# Altium PCB S3E_A25P01-01A.PcbDoc
Units mm, origin at the board's own origin, x right, y up, seen from the top; angles counter-clockwise.
Board outline 95 x 85 mm, 2 copper layers (Top Layer, Bottom Layer); 39 components, 33 nets, 139 pads, 34 vias.
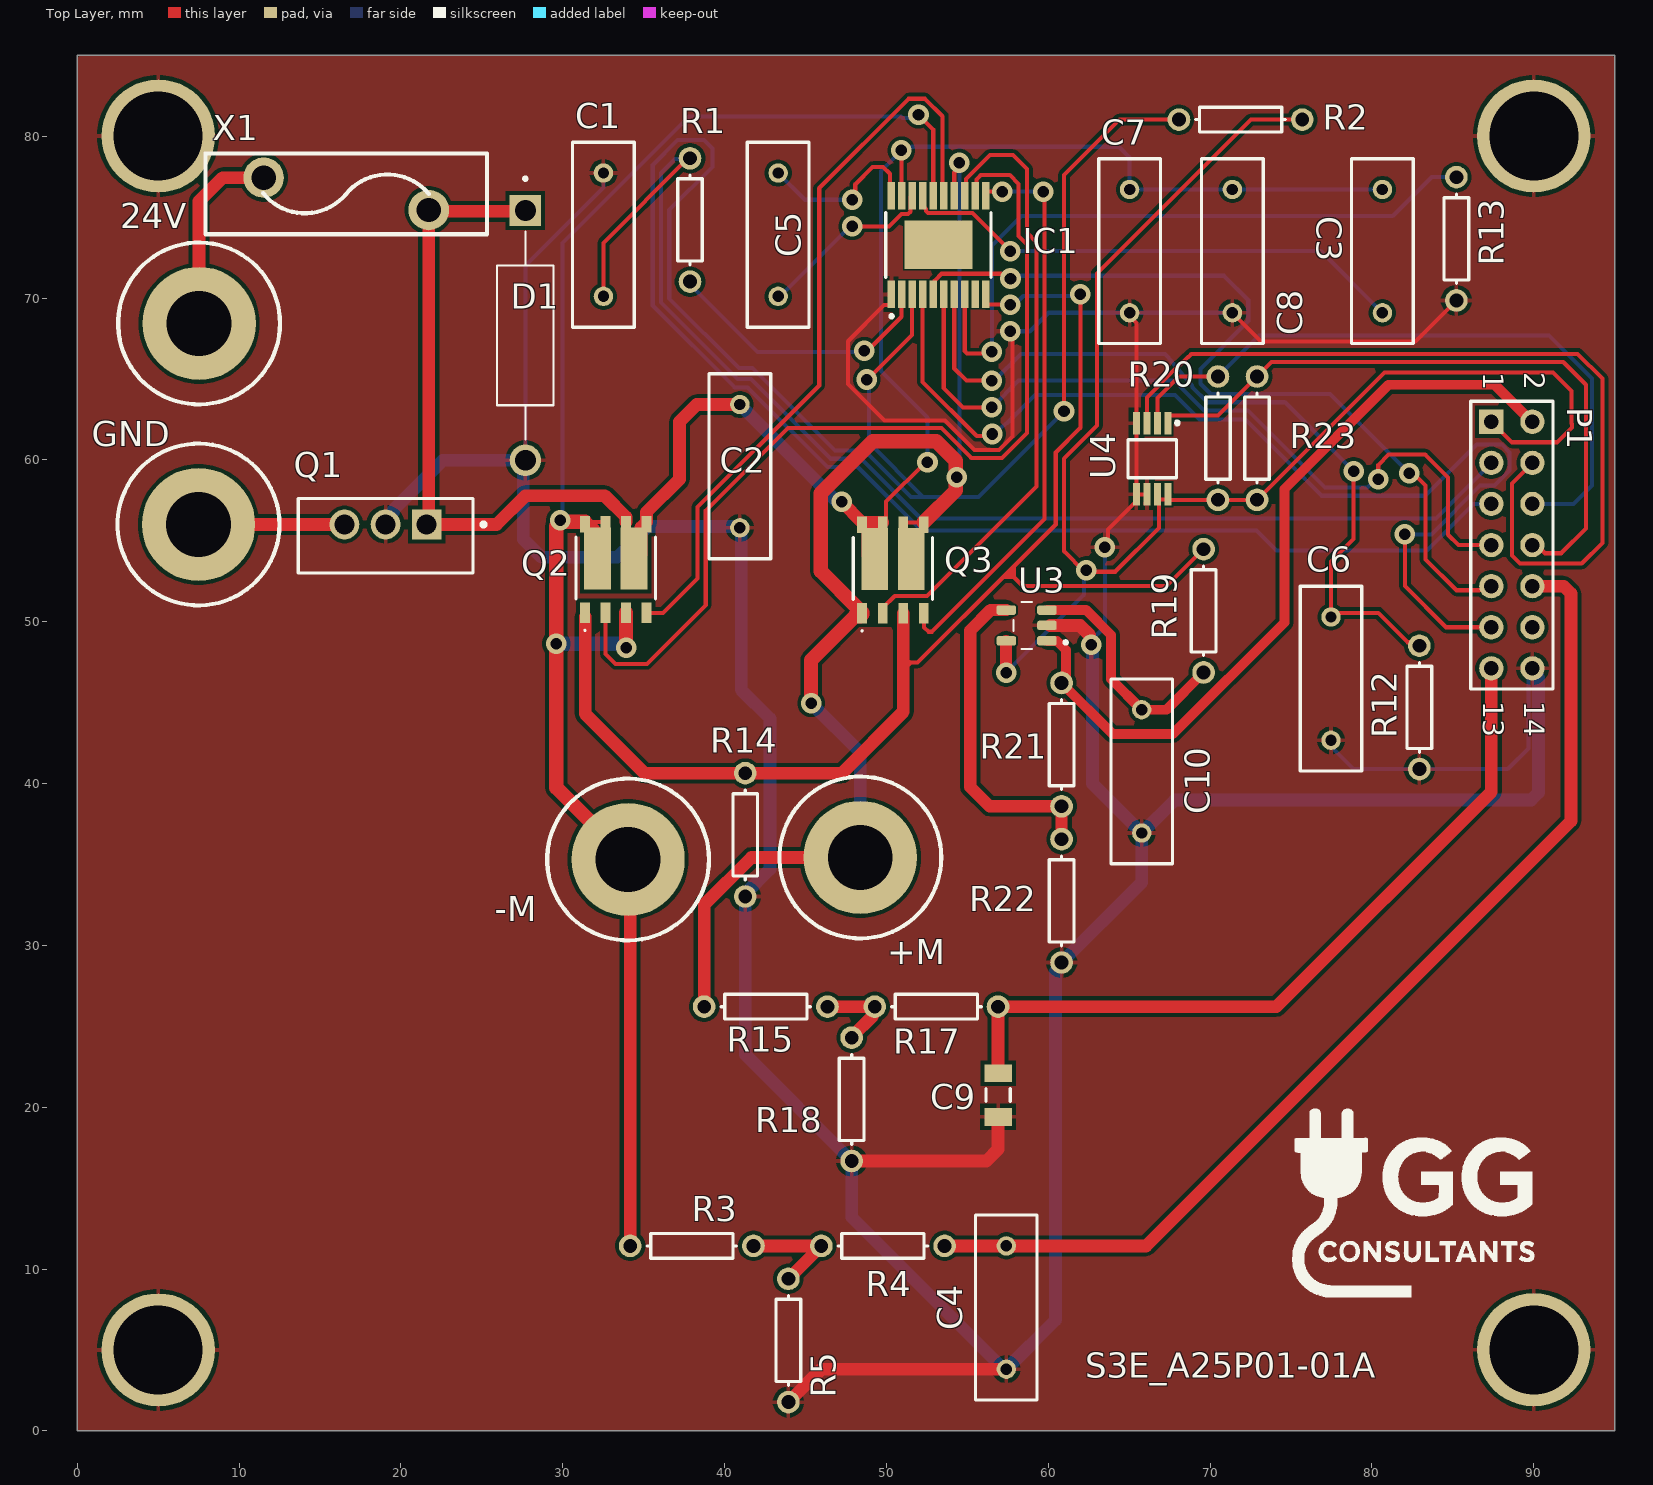
[diagram p0: Top Layer view]
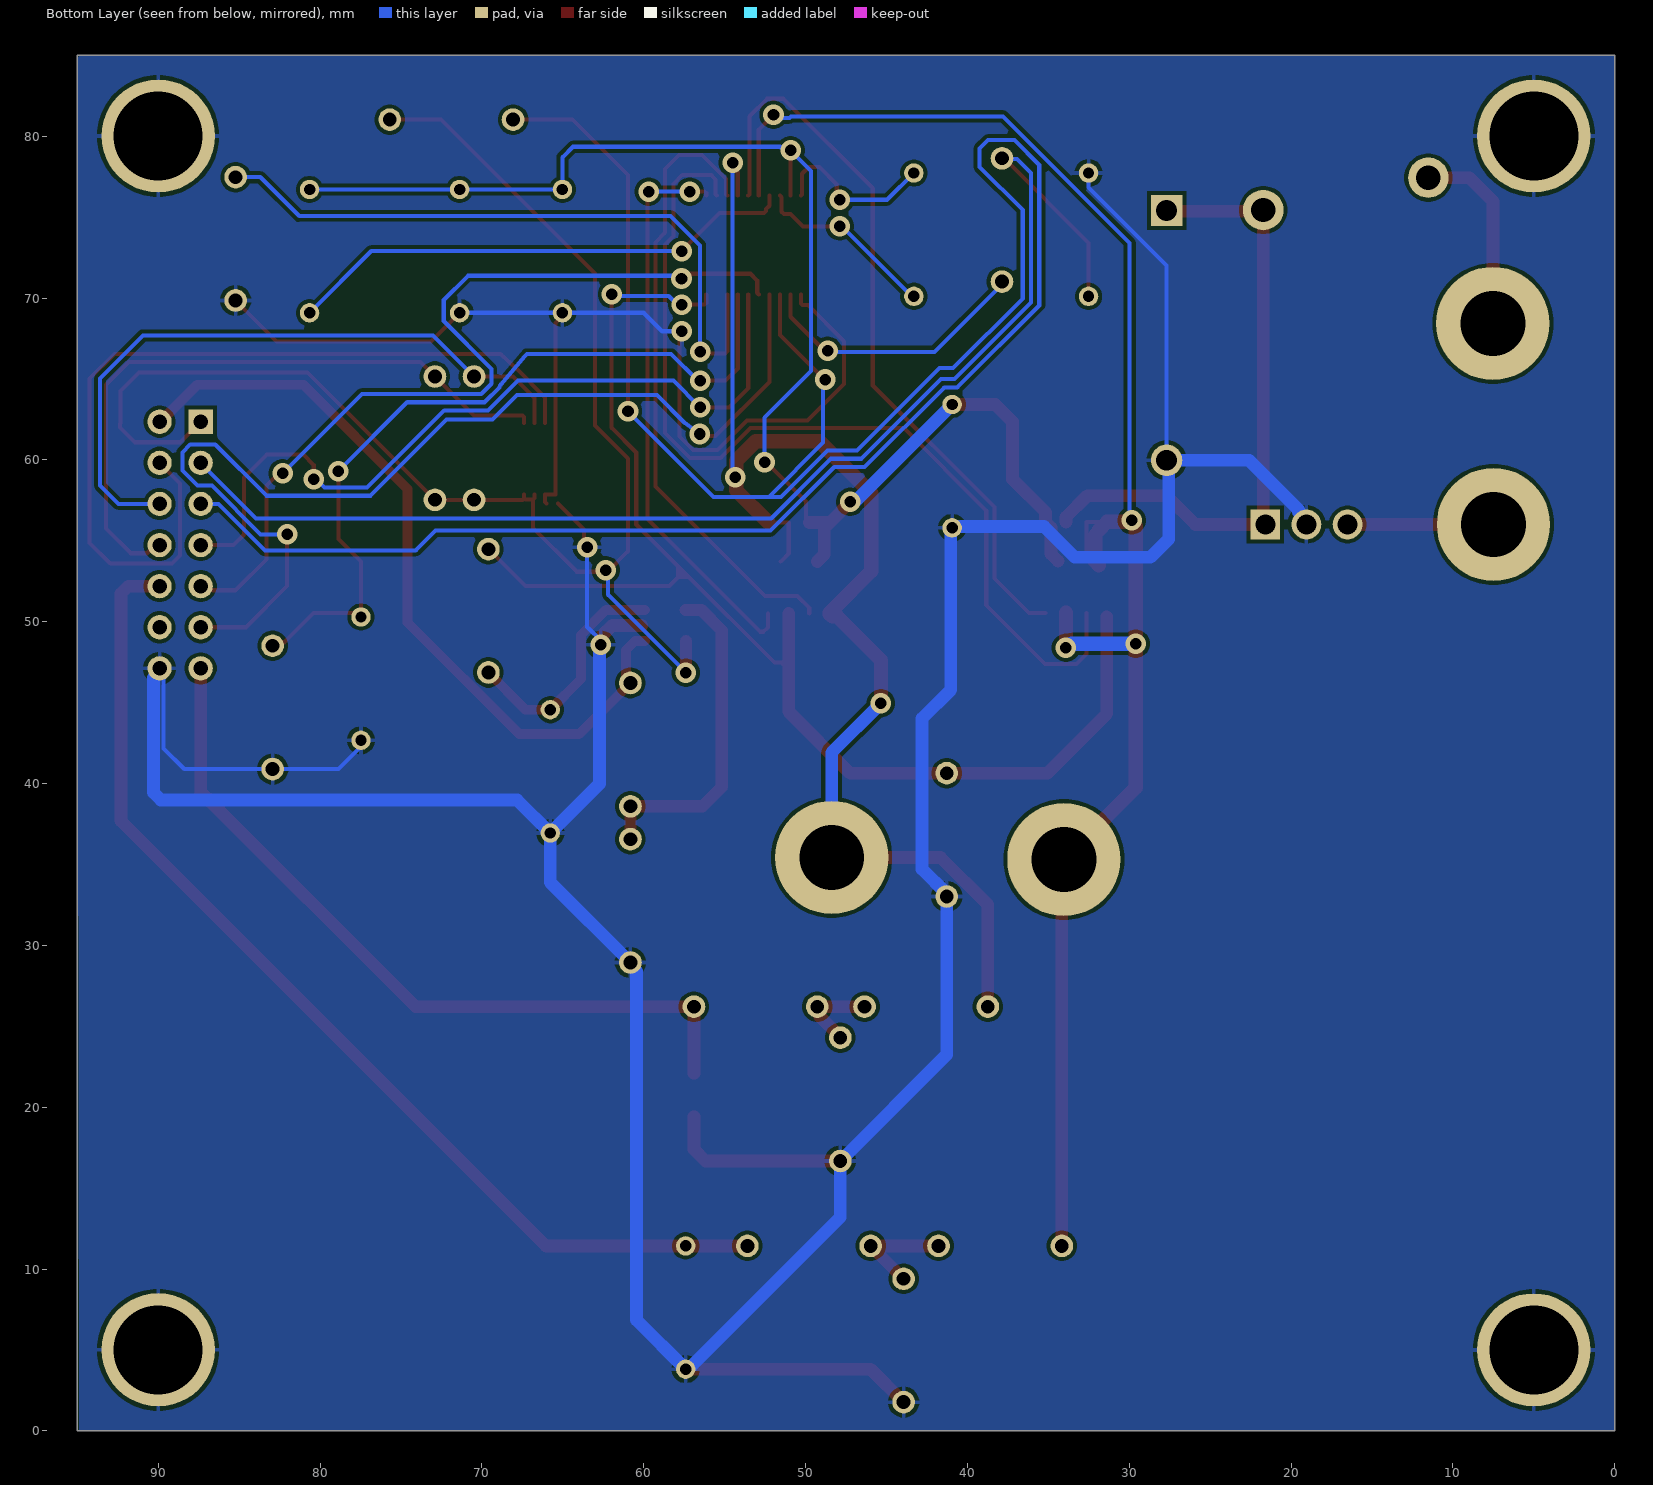
[diagram p1: Bottom Layer view, seen from below]

## Layer stack, top to bottom
Top Solder: solder mask 0.0102, Solder Resist, Dk 3.5
Top Layer: signal copper 0.0356
Dielectric 1: dielectric 0.32, FR-4, Dk 4.8
Bottom Layer: signal copper 0.0356
Bottom Solder: solder mask 0.0102, Solder Resist, Dk 3.5

## Board outline
0,0 0,85 95,85 95,0

## Design rules (kind name [scope] priority, off if disabled: settings)
Clearance [InComponentClass('U_class')] p1: gap=0.102 ignorepadtopadclearanceinfootprint=TRUE
Clearance Clearance_1 [All] p2: gap=0.229 ignorepadtopadclearanceinfootprint=TRUE
Height height [All] p1: minheight=0 maxheight=30.48 prefheight=12.7
Height Height3 [InComponent('No Component')] p2: minheight=0 maxheight=30.48 prefheight=12.7
HoleSize [All] p1: absolutevalues=TRUE maxlimit=76.2 minlimit=0.025 maxpercent=80.000 minpercent=20.000
MinimumSolderMaskSliver [All] p1: minsoldermaskwidth=0.102
PolygonConnect [All] p1: connectstyle=Relief reliefconductorwidth=0.254 reliefentries=4 polygonreliefangle="90 Angle" airgapwidth=0.254
RoutingVias [All] p1: holewidth=0.711 width=1.27 viastyle="Through Hole" minholewidth=0.711 minwidth=1.27 maxholewidth=0.711 maxwidth=1.27
ShortCircuit "ShortCircuit Q2 & Q3" [InComponentClass('ShortCircuitAllowed')] p1: allowed=TRUE
ShortCircuit [All] p2: allowed=FALSE
ShortCircuit ShortCircuit_1 [All] p3: allowed=FALSE
SilkToSolderMaskClearance [All] p1: minsilkscreentomaskgap=0 clearancetoexposedcopper=TRUE
SolderMaskExpansion [All] p1: expansion=0.102 istentingtop=FALSE
SupplyNets "Schematic Supply Nets" [InNet('GND')] p1: voltage=0.000
Width [All] p1: maxlimit=1.27 minlimit=0.254 preferedwidth=0.254
25 further rules are at their usual default settings.

## Components (designator, comment, footprint, x,y, rotation, side; value= is the part's Value field where it differs from the comment)
24V "VCC_pin" banana_connector 7.528,68.43 r0 top
+M "VCC_pin" banana_connector 48.387,35.433 r90 top
-M "VCC_pin" banana_connector 34.036,35.306 r90 top
C1 "Cap" RAD-0.3 32.512,73.914 r270 top value=100pF
C2 "Cap" RAD-0.3 40.942,59.611 r90 top value=100pF
C3 "Cap" RAD-0.3 80.645,72.898 r270 top value=100pF
C4 "Cap" RAD-0.3 57.404,7.62 r90 top value=6n
C5 "Cap" RAD-0.3 43.307,73.914 r270 top value=100pF
C6 "Cap" RAD-0.3 77.47,46.482 r90 top value=1n
C7 "Cap" RAD-0.3 65.024,72.898 r90 top value=100pF
C8 "Cap" RAD-0.3 71.374,72.898 r90 top value=100pF
C9 "Cap" C1206 56.896,20.753 r90 top value=6n
C10 "Cap" RAD-0.3 65.773,40.753 r90 top value=6n
D1 "1N5360BG" DIOAD1543W101L863D368 27.686,67.691 r270 top
GND "VCC_pin" banana_connector 7.493,56.007 r0 top
IC1 "A4955GLPTR-T" A4405KLPTRT 53.213,73.279 r90 top
P1 "Header 7X2" HDR2X7 87.376,62.357 r270 top
Q1 "IRFB7545" IFX-PG-TO220-3-904 19.05,56.007 r270 top
Q2 "HP8KF7HTB1" HP8KC6TB1 33.274,56.521 r0 top
Q3 "HP8KF7HTB1" HP8KC6TB1 50.403,56.491 r0 top
R1 "Res1" AXIAL-0.3 37.861,74.824 r90 top value=1K
R2 "Res1" AXIAL-0.3 71.882,81.026 r0 top value=1K
R3 "Res1" AXIAL-0.3 37.973,11.43 r0 top value=240k
R4 "Res1" AXIAL-0.3 49.784,11.43 r0 top value=10K
R5 "Res1" AXIAL-0.3 43.942,5.588 r90 top value=60K
R12 "30k" AXIAL-0.3 82.931,44.704 r90 top
R13 "Res1" AXIAL-0.3 85.217,73.66 r90 top value=150k
R14 "Res1" AXIAL-0.3 41.275,36.83 r90 top value=0.25
R15 "Res1" AXIAL-0.3 42.545,26.214 r0 top value=240k
R17 "Res1" AXIAL-0.3 53.086,26.214 r0 top value=10K
R18 "Res1" AXIAL-0.3 47.849,20.487 r90 top value=60K
R19 "Res1" AXIAL-0.3 69.596,50.673 r270 top value=10K
R20 "Res1" AXIAL-0.3 70.485,61.341 r90 top value=10K
R21 "Res1" AXIAL-0.3 60.82,42.404 r90 top value=1.25M
R22 "Res1" AXIAL-0.3 60.82,32.752 r90 top value=1K
R23 "Res1" AXIAL-0.3 72.898,61.341 r90 top value=10K
U3 "LMV321AIDBVRG4" SOT95P280X145-5N 58.661,49.77 r180 top
U4 "MCP9808-E/MS" SOP65P490X110-8N 66.421,60.071 r270 top
X1 "MF-R500-2" MF-R500-2 16.617,76.438 r0 top

## Footprints (in the part's own frame and the unit in brackets; to place one, negate y for a bottom-side part, rotate by r counter-clockwise, add the part's x,y. Pads: shape width x height; smd on the part's side, far side on the other; paste and mask are expansions set on the pad)
A4405KLPTRT [mm]
  rect 1.7x0.45 smd: 1(-3.05,2.925) 2(-3.05,2.275) 3(-3.05,1.625) 4(-3.05,0.975) 5(-3.05,0.325) 6(-3.05,-0.325) 7(-3.05,-0.975) 8(-3.05,-1.625) 9(-3.05,-2.275) 10(-3.05,-2.925) 11(3.05,-2.925) 12(3.05,-2.275) 13(3.05,-1.625) 14(3.05,-0.975) 15(3.05,-0.325) 16(3.05,0.325) 17(3.05,0.975) 18(3.05,1.625) 19(3.05,2.275) 20(3.05,2.925)
  rect 3x4.2 smd: 21(0,0)
  silkscreen extent -4.5,-3.25 2,3.25, body extent -3.19,-3.31 3.21,3.29, height 1.04
AXIAL-0.3 [mm] "Axial Device, Thru-Hole; 2 Leads; 0.3 in Pin Spacing"
  round 1.4 hole 0.85: 1(-3.81,0) 2(3.81,0)
  silkscreen extent -2.77,-0.76 2.77,0.76
banana_connector [mm]
  round 7 hole 4: 1(0,0)
  silkscreen extent -5,-5 5,5
C1206 [mm] "Chip Capacitor, Body 3.2x1.6mm, IPC High Density"
  rect 1.1x1.7 smd: 1(-1.35,0) 2(1.35,0)
  silkscreen extent -0.4,-0.75 0.4,0.75, body extent -1.7,-0.9 1.7,0.9, height 1.3
DIOAD1543W101L863D368 [mm]
  rect 1.94x1.94 / inner round 1.94 / far side rect 1.94x1.94 hole 1.29: 1(-7.715,0)
  round 1.94 hole 1.29: 2(7.715,0)
  silkscreen extent -9.78,-1.74 6.42,1.74
HDR2X7 [mm] "Connector; Header; 7x2 Position"
  rect 1.5x1.5 hole 0.9: 1(0,0)
  round 1.5 hole 0.9: 2(0,2.54) 3(2.54,0) 4(2.54,2.54) 5(5.08,0) 6(5.08,2.54) 7(7.62,0) 8(7.62,2.54) 9(10.16,0) 10(10.16,2.54) 11(12.7,0) 12(12.7,2.54) 13(15.24,0) 14(15.24,2.54)
  silkscreen extent -1.27,-1.27 16.51,3.81
HP8KC6TB1 [mm]
  rect 0.61x1.27 smd: 1(-1.905,-5.975) 2(-0.635,-5.975) 3(0.635,-5.975) 4(1.905,-5.975)
  rect 1.655x3.5 smd: 5(1.127,-2.77) 8(-1.127,-2.77)
  rect 1.91x0.31 smd: 5(1.255,-0.864) 8(-1.255,-0.864)
  rect 0.61x0.71 smd: 5(1.905,-0.355) 6(0.635,-0.355) 7(-0.635,-0.355) 8(-1.905,-0.355)
  silkscreen extent -2.45,-7.1 2.45,-1.3, body extent -2.51,-6.31 2.51,-0.31, height 1
IFX-PG-TO220-3-904 [mm] "TO,flange mount,2.54mm pitch;3 pin,4.45mm L X 10.66mm W X 19.15mm H body"
  rect 1.84x1.84 hole 1.24 paste-2539.97 mask+0: 1(0,2.54)
  round 1.84 hole 1.24 paste-2539.97 mask+0: 2(0,0) 3(0,-2.54)
  silkscreen extent -1.6,-5.4 3,6.18, body extent -1.53,-5.33 2.93,5.33, height 19.1
MF-R500-2 [mm]
  round 2.5 hole 1.5: 1(-5.1,1) 2(5.1,-1)
  silkscreen extent -8.7,-2.5 8.7,2.5, body extent -8.7,-1.5 8.7,1.5, height 28.75
RAD-0.3 [mm] "Radial Cap, Thru-Hole; 2 Leads; 0.3 in Pin Spacing"
  round 1.2 hole 0.7: 1(-3.81,0) 2(3.81,0)
  silkscreen extent -5.71,-1.91 5.71,1.91
SOP65P490X110-8N [mm]
  rect 1.4x0.45 smd: 1(-2.2,0.975) 2(-2.2,0.325) 3(-2.2,-0.325) 4(-2.2,-0.975) 5(2.2,-0.975) 6(2.2,-0.325) 7(2.2,0.325) 8(2.2,0.975)
  silkscreen extent -2.39,-1.5 1.18,1.73, body extent -2.45,-1.5 2.45,1.5, height 1.1
SOT95P280X145-5N [mm]
  rrect50% 1.21x0.59 smd: 1(-1.255,0.95) 2(-1.255,0) 3(-1.255,-0.95) 4(1.255,-0.95) 5(1.255,0.95)
  silkscreen extent -2.51,-1.45 0.8,1.45, body extent -1.4,-1.45 1.4,1.45, height 1.45

## Part data
C1 C2 C3 C4 C5 C6 C7 C8 C9 C10: "Capacitor", LatestRevisionDate=17-Jul-2002, LatestRevisionNote="Re-released for DXP Platform.", PackageDescription="Radial Cap, Thru-Hole; 2 Leads; 0.3 in Pin Spacing", PackageReference=RAD-0.3, Published=8-Jun-2000, Publisher="Altium Limited"
D1: Package=None, Availability=Unavailable, MF="{'manufacturer': u'onsemi'}", MP=1N5360BG, Price=None
IC1: "Integrated Circuit", Manufacturer_Name="Allegro Microsystems", Mouser Part Number=250-A4955GLPTR-T, Arrow Part Number=A4955GLPTR-T, Arrow Price/Stock=null?region=nac, Datasheet Link=https://www.allegromicro.com/~/media/Files/Datasheets/A4955-Datasheet.ashx, Height=1.2mm, Manufacturer_Part_Number=A4955GLPTR-T, Mouser Price/Stock=https://www.mouser.co.uk/ProductDetail/Allegro-MicroSystems/A4955GLPTR-T?qs=pUKx8fyJudCBeWBIJtW5Eg%3D%3D
P1: "Header, 7-Pin, Dual row", LatestRevisionDate=17-Jul-2002, LatestRevisionNote="Re-released for DXP Platform.", Publisher="Altium Limited"
Q1: "Insulated-Gate Field-Effect Transistor (IGFET), N-Channel, Enhancement, Body Diode, Pin 1 Gate, 2 Drain, 3 Source, 3 Pins", Manufacturer="Infineon Technologies", Manufacturer Order Number=IRFB7545, PackageReference=PG-TO220-3-904
Q2 Q3: "MOSFET (N-Channel)", Manufacturer_Name="ROHM Semiconductor", Datasheet Link=https://fscdn.rohm.com/en/products/databook/datasheet/discrete/transistor/mosfet/hp8kf7htb1-e.pdf, Height=1.1mm, Manufacturer_Part_Number=HP8KF7HTB1
R1 R2 R3 R4 R5 R13 R14 R15 R17 R18 R19 R20 R21 R22 R23: "Resistor", LatestRevisionDate=17-Jul-2002, LatestRevisionNote="Re-released for DXP Platform.", PackageDescription="Axial Device, Thru-Hole; 2 Leads; 0.3 in Pin Spacing", PackageReference=AXIAL-0.3, Published=8-Jun-2000, Publisher="Altium Limited"
R12: library part Res1, "Resistor", LatestRevisionDate=17-Jul-2002, LatestRevisionNote="Re-released for DXP Platform.", PackageDescription="Axial Device, Thru-Hole; 2 Leads; 0.3 in Pin Spacing", PackageReference=AXIAL-0.3, Published=8-Jun-2000, Publisher="Altium Limited"
U3: "Single Low-Voltage Rail-to-Rail Output Operational Amplifier see LMV321A for upgraded version 5-SOT-23 -40 to 125", Package="SOT-23-5 Texas Instruments", Check_prices=https://www.snapeda.com/parts/LMV321IDBVRG4/Texas+Instruments/view-part/?ref=eda, MF="Texas Instruments", MP=LMV321IDBVRG4, SnapEDA_Link=https://www.snapeda.com/parts/LMV321IDBVRG4/Texas+Instruments/view-part/?ref=snap
U4: "Microchip MCP9808-E/MS Temperature Sensor 8-Pin MSOP, -40 - +125 degC", Package="MSOP-8 Microchip", Check_prices=https://www.snapeda.com/parts/MCP9808-E/MS/Microchip/view-part/?ref=eda, MF=Microchip, MP=MCP9808-E/MS, SnapEDA_Link=https://www.snapeda.com/parts/MCP9808-E/MS/Microchip/view-part/?ref=snap

## Free pads (board coordinates)
  round 7 hole 5.5: 7(5,5) 7(5,80.011) 7(90,5.011) 7(90,80.011)

## Via types
v1: diameter 1.27, hole 0.711, Top Layer to Bottom Layer, 34 vias

## Nets (pads, with @x,y where several pads share a name; then routed paths per layer and width w, separated by ;. In a path a pad name is that pad's centre, name@x,y a point inside that pad or via, vN(x,y) a via of type N, cw(c..) or ccw(c..) an arc to the next point about the centre after c; other vN are vias at no path point)
+5V: P1.1 R2.2 R20.1 R23.1 U3.5 U4.7 U4.8 | length 92.4
  Top Layer w0.254: U3.5@57.391,48.805 U3.5 ; v1@62.357,53.086 64.135,53.086 66.844,55.795 U4.7@66.844,57.549 ; v1(62.357,53.188) 62.243,53.073 60.96,54.356 60.96,60.071 63.002,62.113 63.002,71.511 72.517,81.026 R2.2 ; U4.7 66.746,57.647 U4.7@66.844,57.549 ; U4.8@67.396,57.629 67.494,57.531 R20.1 R23.1 80.772,65.405 91.186,65.405 92.329,64.262 92.329,62.23 92.351,62.208 92.351,61.998 91.44,61.087 88.646,61.087 P1.1 ; U4.8 67.396,57.647 67.298,57.549 U4.7@66.844,57.549
  Top Layer w0.762: v1(57.391,46.849) U3.5@57.391,48.805
  Bottom Layer w0.254: v1(57.391,46.849) 62.211,51.669 62.211,53.042 v1(62.357,53.188)
AIOUT: C1.2 P1.3 R1.2 | length 79.1
  Top Layer w0.254: C1.2 32.512,73.406 R1.2@37.719,78.613
  Bottom Layer w0.254: R1.2 37.731,78.676 37.64,78.585 36.929,78.585 36.068,77.724 36.068,69.723 40.802,64.989 41.638,64.989 46.556,60.071 48.436,60.071 48.51,59.997 52.119,56.388 83.947,56.388 P1.3
GHA: IC1.15 Q2.4 | length 46.5
  Top Layer w0.254: Q2.4 36.195,50.546 38.329,52.68 38.329,57.081 45.847,64.599 45.847,76.786 51.373,82.312 52.39,82.312 53.469,81.234 53.469,76.398 IC1.15
GHB: IC1.13 Q3.2 | length 38.6
  Top Layer w0.254: Q3.2 49.768,50.846 50.512,51.59 52.515,51.59 59.277,58.352 59.277,73.434 58.674,74.037 58.674,77.978 57.81,78.842 56.39,78.842 54.907,77.359 54.907,76.398 IC1.13
GLA: IC1.12 Q2.2 | length 59.3
  Top Layer w0.254: Q2.2 32.639,48.006 33.249,47.396 35.199,47.396 38.837,51.034 38.837,56.871 43.925,61.959 53.409,61.959 55.242,60.125 57.144,60.125 58.681,61.662 58.681,73.312 58.166,73.827 58.166,77.053 57.622,77.597 55.828,77.597 55.557,77.326 55.557,76.398 IC1.12
GLB: IC1.11 Q3.4 | length 35.3
  Top Layer w0.254: Q3.4 52.325,50.499 52.325,49.649 52.593,49.381 52.803,49.381 59.76,56.338 59.76,76.511 v1(59.69,76.581) ; IC1.11 56.138,76.483 56.236,76.581 v1(57.15,76.581)
  Bottom Layer w0.254: v1(57.15,76.581) v1(59.69,76.581)
GND: C1.1 C2.1 C4.1 C6.1 C7.1 C8.1 C9.1 C10.1 D1.2 IC1.1 P1.14 pad.7 Q1.2 R5.1 R12.1 R13.1 R14.1 R18.1 R22.1 U3.2 U4.4 U4.5 U4.6 | length 318.6
  Top Layer w0.254: IC1.1 50.288,69.656 50.19,69.558 49.853,69.558 47.625,67.33 47.625,64.687 49.87,62.441 53.609,62.441 55.442,60.608 56.944,60.608 57.785,61.449 57.785,67.818 v1(57.658,67.945) ; v1(63.5,54.61) 63.694,54.804 63.694,55.693 U4.5@65.299,57.298 ; C7.1 65.024,68.888 65.446,68.466 U4.5 U4.6 66.096,57.396 U4.6@65.998,57.298 ; C8.1 73.152,67.31 82.677,67.31 R13.1
  Top Layer w0.787: Q1.2 Q1.2@19.177,55.88 ; R5.1 45.974,3.81 C4.1 ; R18.1 56.174,16.677 56.896,17.399 C9.1 ; U3.2@60.128,49.77 61.948,49.77 62.558,49.16 62.558,48.657 v1(62.65,48.564)
  Bottom Layer w0.254: D1.2 27.686,72.001 32.512,76.827 C1.1 ; v1(57.658,67.945) 58.855,67.945 59.998,69.088 C7.1 C8.1 ; v1(62.65,48.564) 62.65,48.827 63.426,49.602 63.5,49.676 v1(63.5,54.61) ; C6.1 77.651,42.491 77.651,42.11 78.867,40.894 R12.1 88.392,40.894 89.662,42.164 89.662,46.345 89.678,46.361 89.678,46.879 P1.14
  Bottom Layer w0.787: Q1.2 19.05,56.292 19.534,56.776 19.534,56.919 22.591,59.976 D1.2 ; D1.2@27.559,59.849 27.559,55.118 28.702,53.975 33.359,53.975 35.264,55.88 41.021,55.88 41.021,45.799 42.799,44.021 42.799,34.71 41.275,33.186 R14.1 41.275,23.251 R18.1 47.849,13.212 57.045,4.016 57.086,4.016 57.292,3.81 C4.1 60.452,6.858 60.452,28.408 60.82,28.776 R22.1 65.773,33.895 C10.1 ; v1(62.65,48.564) 62.725,48.489 62.725,39.991 C10.1 ; P1.14 89.916,46.924 90.297,46.543 90.297,39.45 89.836,38.989 67.82,38.989 C10.1
IN1: IC1.6 P1.7 | length 49.3
  Top Layer w0.254: IC1.6 53.538,64.445 54.737,63.246 v1(56.515,63.246) ; v1(80.391,58.801) 80.391,59.69 81.026,60.325 83.29,60.325 84.709,58.906 84.709,55.372 85.344,54.737 P1.7
  Bottom Layer w0.254: v1(56.515,63.246) 58.166,64.897 67.773,64.897 69.616,63.054 72.328,63.054 77.089,58.293 79.734,58.293 80.242,58.801 v1(80.391,58.801)
IN2: IC1.5 P1.9 | length 53.7
  Top Layer w0.254: IC1.5 52.986,70.327 52.986,71.075 53.412,71.501 57.094,71.501 57.39,71.206 v1(57.665,71.206) ; v1(82.315,59.163) 82.569,59.163 83.312,58.42 83.312,53.848 85.217,51.943 86.604,51.943 86.62,51.959 87.138,51.959 P1.9
  Bottom Layer w0.254: v1(57.665,71.206) 57.833,71.374 70.866,71.374 72.355,69.885 72.355,68.574 69.404,65.623 69.404,64.703 70.037,64.07 77.408,64.07 v1(82.315,59.163)
Mesure_1: +M.1 IC1.14 Q3.1 Q3.5 Q3.6 R15.1 | length 84.1
  Top Layer w0.254: R15.1 R15.1@38.952,26.214 ; Q3.5@51.53,53.721 51.038,54.213 Q3.6 Q3.5@52.308,56.136 ; IC1.14 54.188,77.765 54.505,78.082 v1(54.505,78.357)
  Top Layer w0.787: R15.1 38.735,32.512 41.656,35.433 +M.1
  Top Layer w0.889: v1(45.339,44.958) 45.339,47.625 48.039,50.325 48.358,50.325 48.498,50.465 48.498,50.567 48.262,50.802 45.936,53.129 45.936,57.946 49.149,61.159 53.077,61.159 54.283,59.953 54.283,59.001 v1(54.356,58.928) 54.283,58.855 54.283,58.111 Q3.5@52.308,56.136
  Bottom Layer w0.254: v1(54.356,58.928) 54.428,58.995 54.505,59.072 v1(54.505,78.357)
  Bottom Layer w0.787: v1(45.339,44.958) 48.387,41.91 +M.1
Mesure_2: -M.1 IC1.16 Q2.3 Q2.7 Q2.8 R3.1 | length 109.7
  Top Layer w0.254: Q2.8@31.369,56.166 32.636,56.166 32.637,56.168 Q2.7 32.639,54.243 Q2.8@32.147,53.751 ; v1(51.98,81.321) 52.888,80.413 IC1.16
  Top Layer w0.787: R3.1 -M.1@34.163,35.56
  Top Layer w0.889: Q2.8@31.878,55.657 31.369,56.166 31.347,56.188 29.918,56.188 v1(29.845,56.261) 29.845,56.158 29.591,55.904 v1(29.591,48.641) 29.591,39.751 -M.1 ; Q2.8@31.89,53.494 32.147,53.751 32.083,53.815 Q2.8@32.083,55.368 ; v1(33.909,48.387) Q2.3
  Bottom Layer w0.254: v1(29.845,56.261) 29.972,56.388 29.972,73.406 37.794,81.228 50.894,81.228 50.996,81.127 51.785,81.127 v1(51.98,81.321)
  Bottom Layer w0.889: v1(29.591,48.641) 33.552,48.641 33.806,48.387 v1(33.909,48.387)
Mesure_courant: P1.2 R21.2 U3.1 | length 48.7
  Top Layer w0.61: U3.1 59.919,48.817 60.53,48.817 61.087,48.26 61.087,46.694 60.82,46.428 R21.2 63.981,43.053 67.691,43.053 74.59,49.952 74.59,58.207 81.026,64.643 87.589,64.643 89.875,62.357 P1.2
Mesure_M+: C9.2 P1.13 R17.2 | length 47.7
  Top Layer w0.787: C9.2 R17.2 74.093,26.214 87.376,39.497 P1.13
Mesure_M-: C4.2 P1.10 R4.2 | length 66.2
  Top Layer w0.787: R4.2 C4.2 66.04,11.43 92.296,37.686 92.296,51.736 91.835,52.197 P1.10
Mesure_temp: P1.4 U4.3 | length 54.2
  Top Layer w0.254: U4.3 66.096,63.857 67.872,65.634 68.834,66.548 92.71,66.548 94.234,65.024 94.234,54.864 92.964,53.594 89.154,53.594 88.72,54.028 88.646,54.102 88.646,54.528 88.646,58.547 P1.4
Net24V_1: 24V.1 X1.1 | length 12.1
  Top Layer w0.787: 24V.1 7.528,75.981 8.985,77.438 X1.1
NetC3_2: C3.2 IC1.17 | length 31.8
  Top Layer w0.254: IC1.17 52.238,75.704 52.434,75.508 52.434,75.384 52.568,75.25 55.306,75.25 v1(57.658,72.898)
  Bottom Layer w0.254: v1(57.658,72.898) 76.835,72.898 C3.2
NetC5_1: C5.1 IC1.20 | length 10.4
  Top Layer w0.254: v1(47.879,76.073) 48.073,76.267 48.073,77.029 49.149,78.105 49.784,78.105 50.208,77.681 50.208,76.409 IC1.20
  Bottom Layer w0.254: C5.1 44.958,76.073 v1(47.879,76.073)
NetC5_2: C5.2 IC1.18 | length 11.4
  Top Layer w0.254: v1(47.879,74.422) 50.165,74.422 50.927,75.184 51.341,75.184 51.49,75.333 51.49,76.231 IC1.18
  Bottom Layer w0.254: C5.2 43.434,70.104 47.752,74.422 v1(47.879,74.422)
NetC6_2: C6.2 IC1.7 R12.2 | length 49.5
  Top Layer w0.254: IC1.7 54.188,65.644 54.935,64.897 v1(56.515,64.897) ; C6.2@77.653,50.546 80.391,50.546 82.204,48.733 82.712,48.733 R12.2 ; C6.2@77.688,50.624 77.688,50.51 C6.2 77.47,53.721 78.867,55.118 v1(78.867,59.309)
  Bottom Layer w0.254: v1(56.515,64.897) 56.66,64.897 58.311,66.548 67.206,66.548 67.355,66.399 68.837,64.641 68.838,64.64 cw(c68.642,64.478) 68.869,64.591 68.921,64.486 68.921,64.467 69.827,63.562 74.614,63.562 v1(78.867,59.309)
NetC10_2: C10.2 R19.2 U3.3 | length 14.8
  Top Layer w0.61: U3.3 59.919,50.722 62.342,50.722 63.881,49.184 63.881,46.455 C10.2 67.296,44.563 R19.2
NetGND_1: GND.1 Q1.3 | length 9.2
  Top Layer w0.254: GND.1@7.429,56.07 GND.1 ; Q1.3 Q1.3@16.573,55.944
  Top Layer w0.787: GND.1 Q1.3
NetIC1_2: IC1.2 R1.1 | length 17.3
  Top Layer w0.254: v1(48.641,66.751) 48.844,66.751 50.938,68.845 IC1.2
  Bottom Layer w0.254: R1.1@37.719,70.993 42.037,66.675 48.565,66.675 v1(48.641,66.751)
NetIC1_8: IC1.8 R13.2 | length 42.3
  Top Layer w0.254: IC1.8 54.838,66.723 54.987,66.574 56.414,66.574 v1(56.515,66.675)
  Bottom Layer w0.254: v1(56.515,66.675) 56.515,73.239 58.339,75.063 81.286,75.063 83.693,77.47 R13.2
NetR3_2: R3.2 R4.1 R5.2 | length 7.2
  Top Layer w0.254: 43.878,11.43 43.942,11.367
  Top Layer w0.762: R5.2 R4.1
  Top Layer w0.787: R3.2 43.878,11.43 R4.1
NetR15_2: R15.2 R17.1 R18.2 | length 5.5
  Top Layer w0.787: R15.2 R17.1 49.159,26.097 49.159,25.647 47.849,24.337 R18.2 R18.2@47.816,24.33
NetR21_1: R21.1 R22.2 U3.4 | length 20.6
  Top Layer w0.762: U3.4 56.436,50.72 55.178,49.461 55.178,39.791 56.375,38.594 R21.1 R22.2
OCLN: IC1.3 P1.5 R2.1 | length 152.8
  Top Layer w0.254: v1(48.783,64.966) 48.837,64.966 51.588,67.717 IC1.3 ; v1(60.97,62.992) 60.97,77.607 64.389,81.026 R2.1
  Bottom Layer w0.254: v1(48.783,64.966) 48.915,64.834 48.915,61.067 52.269,57.713 ; v1(60.97,62.992) 55.692,57.714 54.299,57.714 54.194,57.713 52.269,57.713 ; P1.5 86.273,57.277 83.403,54.407 74.087,54.407 72.868,55.626 69.95,55.626 cw(c69.946,57.832) 69.945,55.626 52.162,55.626 48.225,59.563 46.345,59.563 41.427,64.481 40.627,64.481 35.56,69.549 35.56,78.227 37.089,79.756 38.735,79.756 39.243,79.248 39.243,78.105 36.576,75.438 36.576,69.977 40.878,65.675 41.724,65.675 46.82,60.579 48.646,60.579 51.512,57.713 52.269,57.713
SCL: P1.6 R20.2 U4.2 | length 41.9
  Top Layer w0.254: U4.2 66.746,63.825 68.072,65.151 R20.2
  Bottom Layer w0.254: R20.2 73.025,67.691 90.932,67.691 93.599,65.024 93.599,58.42 92.456,57.277 P1.6
SDA: P1.8 R23.2 U4.1 | length 41.2
  Top Layer w0.254: U4.1 67.396,62.64 67.494,62.738 70.485,62.738 R23.2 73.787,66.04 91.821,66.04 93.218,64.643 93.218,55.753 91.694,54.229 90.688,54.229 90.18,54.737 P1.8
SENSE: IC1.10 Q2.1 Q3.3 R14.2 R19.1 | length 83.5
  Top Layer w0.254: 51.038,47.475 51.442,47.475 51.24,47.677 51.038,47.879 ; 51.28,47.232 51.523,47.475 51.92,47.475 57.531,53.086 ; IC1.10 56.138,69.694 56.236,69.596 v1(57.658,69.596) ; v1(61.986,70.227) 61.986,61.987 60.462,60.463 60.462,56.017 57.531,53.086 ; R19.1 67.31,52.197 58.42,52.197 57.531,53.086
  Top Layer w0.787: Q2.1@31.385,50.305 31.385,44.307 35.052,40.64 R14.2 47.244,40.64 51.038,44.434 51.038,46.99 51.038,47.475 51.038,47.879 Q3.3
  Bottom Layer w0.254: v1(57.658,69.596) 57.933,69.596 58.452,70.115 61.874,70.115 v1(61.986,70.227)
TR2_DRAIN: C2.2 C3.1 C7.2 C8.2 D1.1 IC1.19 Q1.1 Q2.5 Q2.6 Q3.7 Q3.8 X1.2 | length 128.7
  Top Layer w0.254: Q3.7@49.976,56.136 49.976,57.416 52.41,59.851 v1(52.535,59.851) ; IC1.19@50.927,76.34 v1(50.927,79.121)
  Top Layer w0.787: D1.1@27.559,75.279 27.479,75.358 21.797,75.358 X1.2 21.717,56.134 Q1.1 25.908,56.007 27.686,57.785 32.596,57.785 33.909,56.472 Q2.6 ; Q2.5@34.401,53.751 34.835,54.185 34.835,55.822 35.179,56.166 35.179,56.769 37.211,58.801 37.211,62.357 38.275,63.421 C2.2 C2.2@41.021,63.5 ; v1(47.244,57.404) 47.244,57.39 Q3.8@48.498,56.136 ; Q3.8@49.276,53.721 48.842,54.155 48.842,55.792 Q3.8@48.498,56.136 ; Q3.7 Q3.8@48.498,56.136
  Bottom Layer w0.254: v1(52.535,59.851) 52.535,62.605 49.657,65.483 49.657,77.851 v1(50.927,79.121) 51.121,79.315 51.552,79.315 51.584,79.348 64.374,79.348 65.024,78.697 C7.2 C8.2 C3.1
  Bottom Layer w0.787: C2.2@41.021,63.5 41.021,63.342 46.867,57.496 47.152,57.496 v1(47.244,57.404)
Vref: IC1.4 P1.11 | length 67
  Top Layer w0.254: IC1.4 52.238,64.811 55.581,61.468 56.404,61.468 v1(56.534,61.599) ; v1(82.028,55.397) 82.042,55.384 82.042,52.197 84.582,49.657 P1.11
  Bottom Layer w0.254: v1(56.534,61.599) 57.462,62.289 59.181,64.008 67.818,64.008 69.342,62.484 72.18,62.484 76.879,57.785 83.312,57.785 86.475,60.948 88.023,60.948 88.507,60.464 88.507,59.349 87.566,58.408 86.685,58.408 83.675,55.397 v1(82.028,55.397)
pads on no net: IC1.9 IC1.21 P1.12

## Polygon pours and split planes (outlines as drawn)
GND on Bottom Layer "GND_L02_P007" (solid, remove dead copper, pour order 7): 0,85 95,85 94.869,0 0,0
GND on Top Layer "GND_L01_P005" (solid, remove dead copper, pour order 5): 0,85 95,85 94.937,0 0.068,0

## Other copper
Top Layer:
  region net SENSE: 57.087,52.642 57.975,52.642 57.975,53.53

## Silkscreen, mask and mechanical layers (free items; w line width, h text height)
Top Overlay:
  drawing of 14 lines, arcs and shapes, not listed
  text "S3E_A25P01‐01A" at 62.298,3.287 h1.52
Mechanical 1:
  lines w0.508: 0,83.439 0,0 ; 94.869,0 0,0 ; 0,0 95,0 95,85 0,85 0,0

## Text inside footprints (layer, text, board x,y; h text height)
P1: Top Overlay "13" at 86.868,45.085 h1.27 r270; Top Overlay "14" at 89.408,45.085 h1.27 r270; Top Overlay "1" at 86.868,65.405 h1.27 r270; Top Overlay "2" at 89.408,65.405 h1.27 r270